# Altium PCB PCB.PcbDoc
Units mil, origin at the board's own origin, x right, y up, seen from the top; angles counter-clockwise.
Board outline 2320 x 1390 mil, 2 copper layers (Top Layer, Bottom Layer); 1 components, 13 nets, 62 pads, 0 vias.
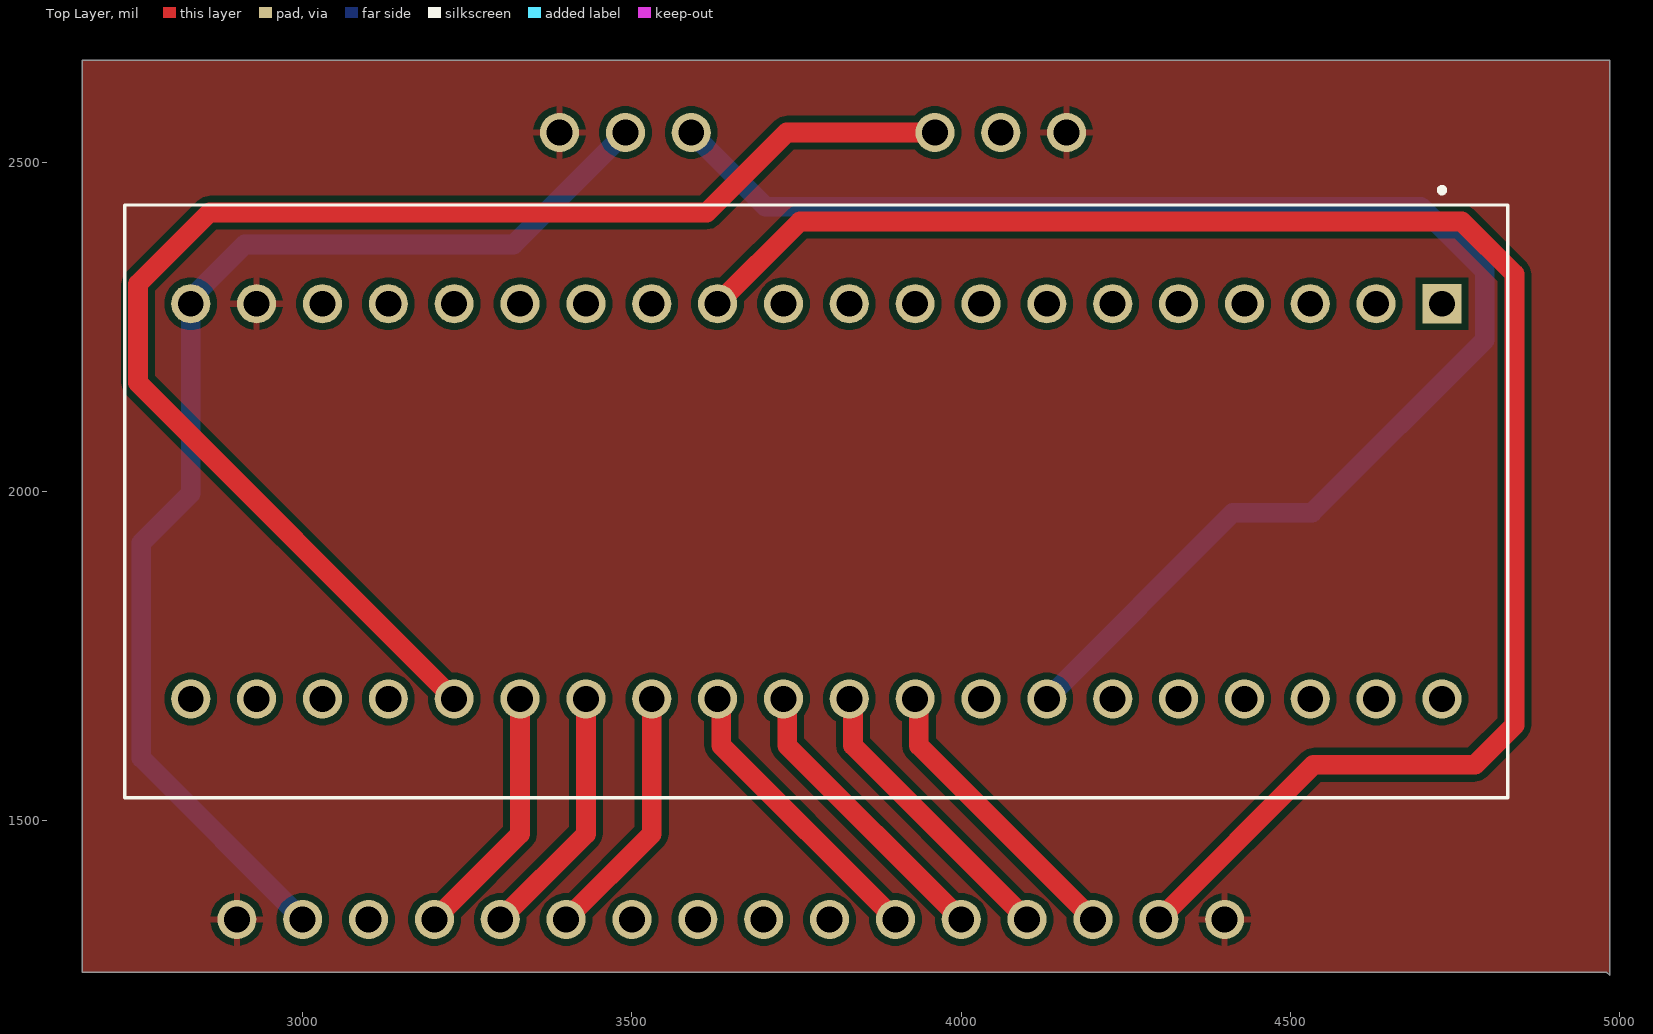
[diagram p0: Top Layer view]
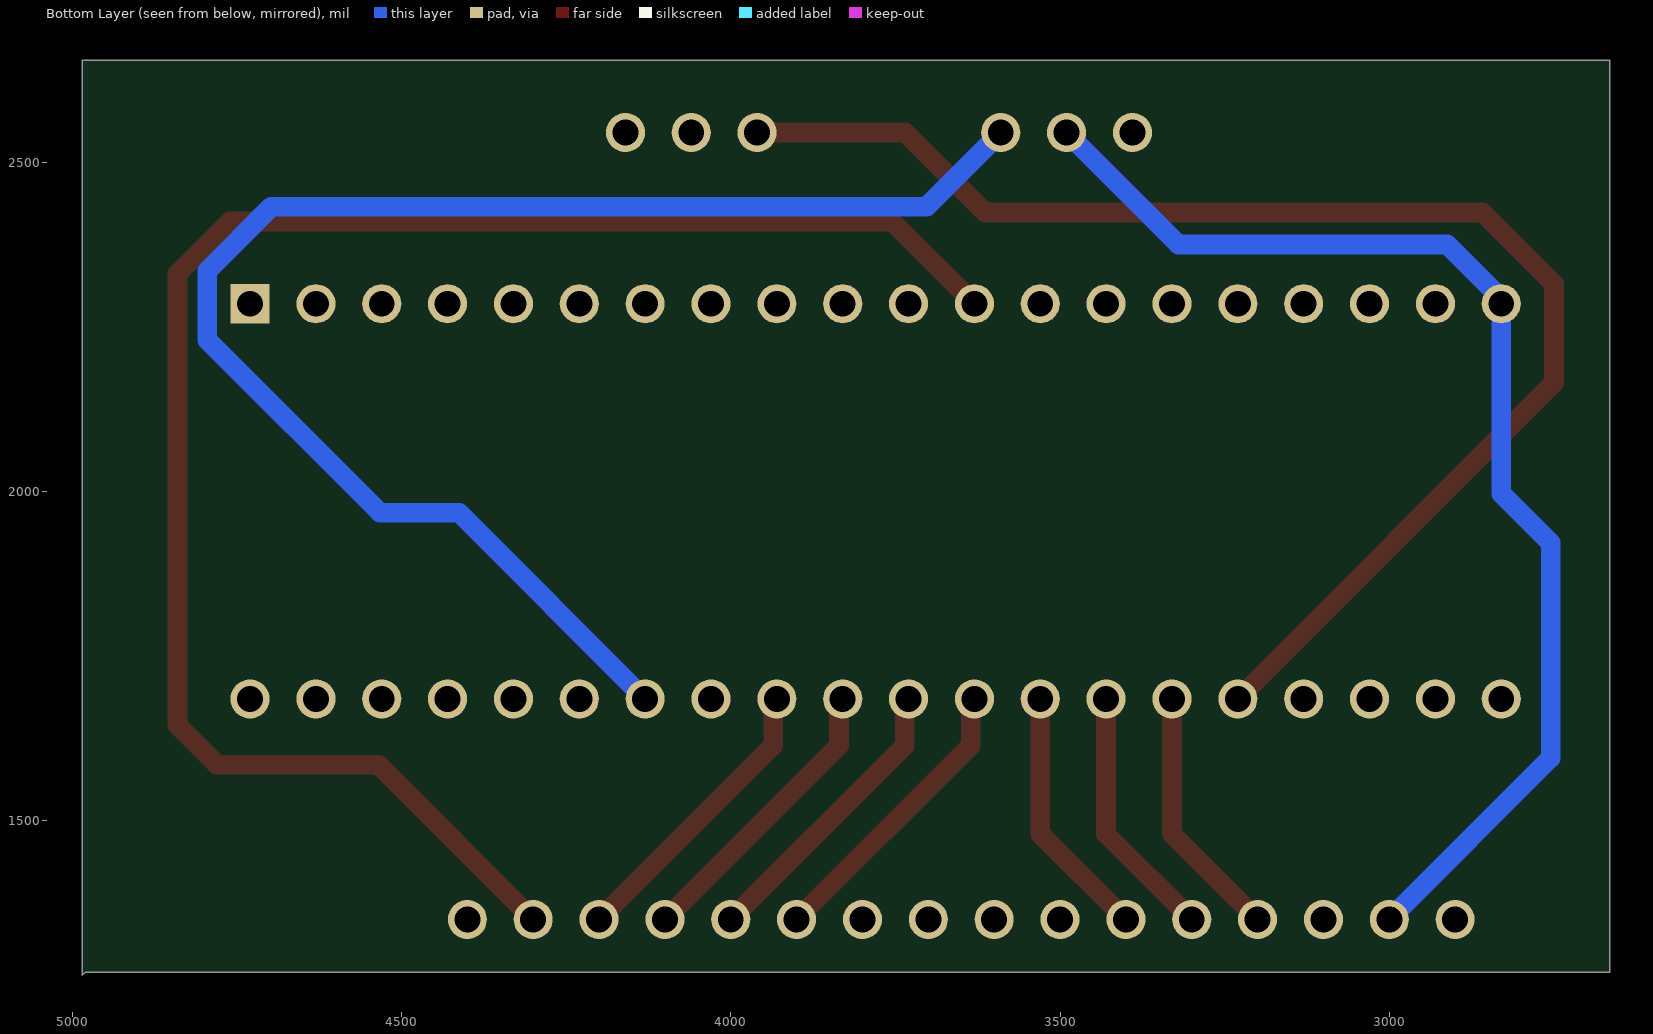
[diagram p1: Bottom Layer view, seen from below]

## Layer stack, top to bottom
Top Solder: solder mask 0.4, Solder Resist, Dk 3.5
Top Layer: signal copper 1.4
Dielectric 1: dielectric 12.6, FR-4, Dk 4.8
Bottom Layer: signal copper 1.4
Bottom Solder: solder mask 0.4, Solder Resist, Dk 3.5

## Board outline
2665,2655 4985,2655 4985,1265 4980,1270 2665,1270

## Design rules (kind name [scope] priority, off if disabled: settings)
Clearance [All] p1: gap=10 ignorepadtopadclearanceinfootprint=FALSE except(0: Arc-Hole Track-Hole SMDPad-Hole THPad-Hole Via-Hole Fill-Hole Poly-Hole Region-Hole Text-Hole)
PolygonConnect [All] p1: connectstyle=Relief reliefconductorwidth=10 reliefentries=4 polygonreliefangle="90 Angle" airgapwidth=10
RoutingVias [All] p1: holewidth=28 width=50 viastyle="Through Hole" minholewidth=28 minwidth=50 maxholewidth=28 maxwidth=50
SolderMaskExpansion [All] p1: expansion=4 istentingtop=FALSE
Width [All] p1: maxlimit=30 minlimit=10 preferedwidth=10 minimp=50.000000 maximp=50.000000 favimp=50.000000
30 further rules are at their usual default settings.

## Components (designator, comment, footprint, x,y, rotation, side; value= is the part's Value field where it differs from the comment)
? "Comment" MODULE_ZC323000 3780,1985 r270 top

## Footprints (in the part's own frame and the unit in brackets; to place one, negate y for a bottom-side part, rotate by r counter-clockwise, add the part's x,y. Pads: shape width x height; smd on the part's side, far side on the other; paste and mask are expansions set on the pad)
MODULE_ZC323000 [mm]
  rect 1.508x1.508 hole 1: 1(-7.62,24.13)
  round 1.508 hole 1: 2(-7.62,21.59) 3(-7.62,19.05) 4(-7.62,16.51) 5(-7.62,13.97) 6(-7.62,11.43) 7(-7.62,8.89) 8(-7.62,6.35) 9(-7.62,3.81) 10(-7.62,1.27) 11(-7.62,-1.27) 12(-7.62,-3.81) 13(-7.62,-6.35) 14(-7.62,-8.89) 15(-7.62,-11.43) 16(-7.62,-13.97) 17(-7.62,-16.51) 18(-7.62,-19.05) 19(-7.62,-21.59) 20(-7.62,-24.13) 21(7.62,-24.13) 22(7.62,-21.59) 23(7.62,-19.05) 24(7.62,-16.51) 25(7.62,-13.97) 26(7.62,-11.43) 27(7.62,-8.89) 28(7.62,-6.35) 29(7.62,-3.81) 30(7.62,-1.27) 31(7.62,1.27) 32(7.62,3.81) 33(7.62,6.35) 34(7.62,8.89) 35(7.62,11.43) 36(7.62,13.97) 37(7.62,16.51) 38(7.62,19.05) 39(7.62,21.59) 40(7.62,24.13)
  silkscreen extent -12.1,-26.67 11.43,26.67

## Free pads (board coordinates)
  round 59.37 hole 39.37: ""(2900,1350) ""(3000,1350) ""(3100,1350) ""(3200,1350) ""(3300,1350) ""(3390,2545) ""(3400,1350) ""(3490,2545) ""(3500,1350) ""(3590,2545) ""(3600,1350) ""(3700,1350) ""(3800,1350) ""(3900,1350) ""(3960,2545) ""(4000,1350) ""(4060,2545) ""(4100,1350) ""(4160,2545) ""(4200,1350) ""(4300,1350) ""(4400,1350)

## Nets (pads, with @x,y where several pads share a name; then routed paths per layer and width w, separated by ;. In a path a pad name is that pad's centre, name@x,y a point inside that pad or via, vN(x,y) a via of type N, cw(c..) or ccw(c..) an arc to the next point about the centre after c; other vN are vias at no path point)
+12V: pad.@4060,2545
A0: ?.25 pad.@3960,2545 | length 2134.1
  Top Layer w30: ?.25 2750,2165 2750,2315 2858.52,2423.52 3613.52,2423.52 3735,2545 pad.@3960,2545
A1: ?.26 pad.@3200,1350 | length 388.8
  Top Layer w30: pad.@3200,1350 3330,1480 ?.26
A2: ?.27 pad.@3300,1350 | length 388.8
  Top Layer w30: pad.@3300,1350 3430,1480 ?.27
A3: ?.28 pad.@3400,1350 | length 388.8
  Top Layer w30: pad.@3400,1350 3530,1480 ?.28
A4: ?.29 pad.@3900,1350 | length 446.8
  Top Layer w30: ?.29 3635.62,1679.38 3635.62,1614.38 pad.@3900,1350
A5: ?.30 pad.@4000,1350 | length 446.8
  Top Layer w30: ?.30 3735.62,1679.38 3735.62,1614.38 pad.@4000,1350
A6: ?.31 pad.@4100,1350 | length 446.8
  Top Layer w30: ?.31 3835.62,1679.38 3835.62,1614.38 pad.@4100,1350
A7: ?.32 pad.@4200,1350 | length 446.8
  Top Layer w30: ?.32 3935.62,1679.38 3935.62,1614.38 pad.@4200,1350
B1: ?.34 pad.@3590,2545 | length 2287.7
  Bottom Layer w30: pad.@3590,2545 3702.79,2432.21 4697.79,2432.21 4795,2335 4795,2230 4532.79,1967.79 4412.79,1967.79 ?.34
B4: ?.12 pad.@4300,1350 | length 2642.1
  Top Layer w30: ?.12 3755,2410 4760,2410 4840,2330 4840,1645 4780,1585 4535,1585 pad.@4300,1350
GND: ?.19 pad.@2900,1350 pad.@3390,2545 pad.@4160,2545 pad.@4400,1350
VCC: ?.20 pad.@3000,1350 pad.@3490,2545 | length 1839.9
  Bottom Layer w30: pad.@3000,1350 2755,1595 2755,1922.04 2830,1997.04 ?.20 2830,2292.95 2912.05,2375 3320,2375 pad.@3490,2545
pads on no net: ?.1 ?.2 ?.3 ?.4 ?.5 ?.6 ?.7 ?.8 ?.9 ?.10 ?.11 ?.13 ?.14 ?.15 ?.16 ?.17 ?.18 ?.21 ?.22 ?.23 ?.24 ?.33 ?.35 ?.36 ?.37 ?.38 ?.39 ?.40

## Polygon pours and split planes (outlines as drawn)
no net on Layer0 "Default Coverlay 1 Top" (split plane): 2665,2655 4985,2655 4985,1265 4980,1270 2665,1270
no net on Layer0 "Default Coverlay 1 Bottom" (split plane): 2665,2655 4985,2655 4985,1265 4980,1270 2665,1270
GND on Top Layer "GND" (solid, pour order 0): 2665,2655 4985,2655 4985,1270 2665,1270